# Altium PCB Program_interface_V2.PcbDoc
Units mm, origin at the board's own origin, x right, y up, seen from the top; angles counter-clockwise.
Board outline 50.04 x 50.8 mm, 2 copper layers (Top Layer, Bottom Layer), stack 1.071 mm thick; 11 components, 14 nets, 64 pads, 11 vias.
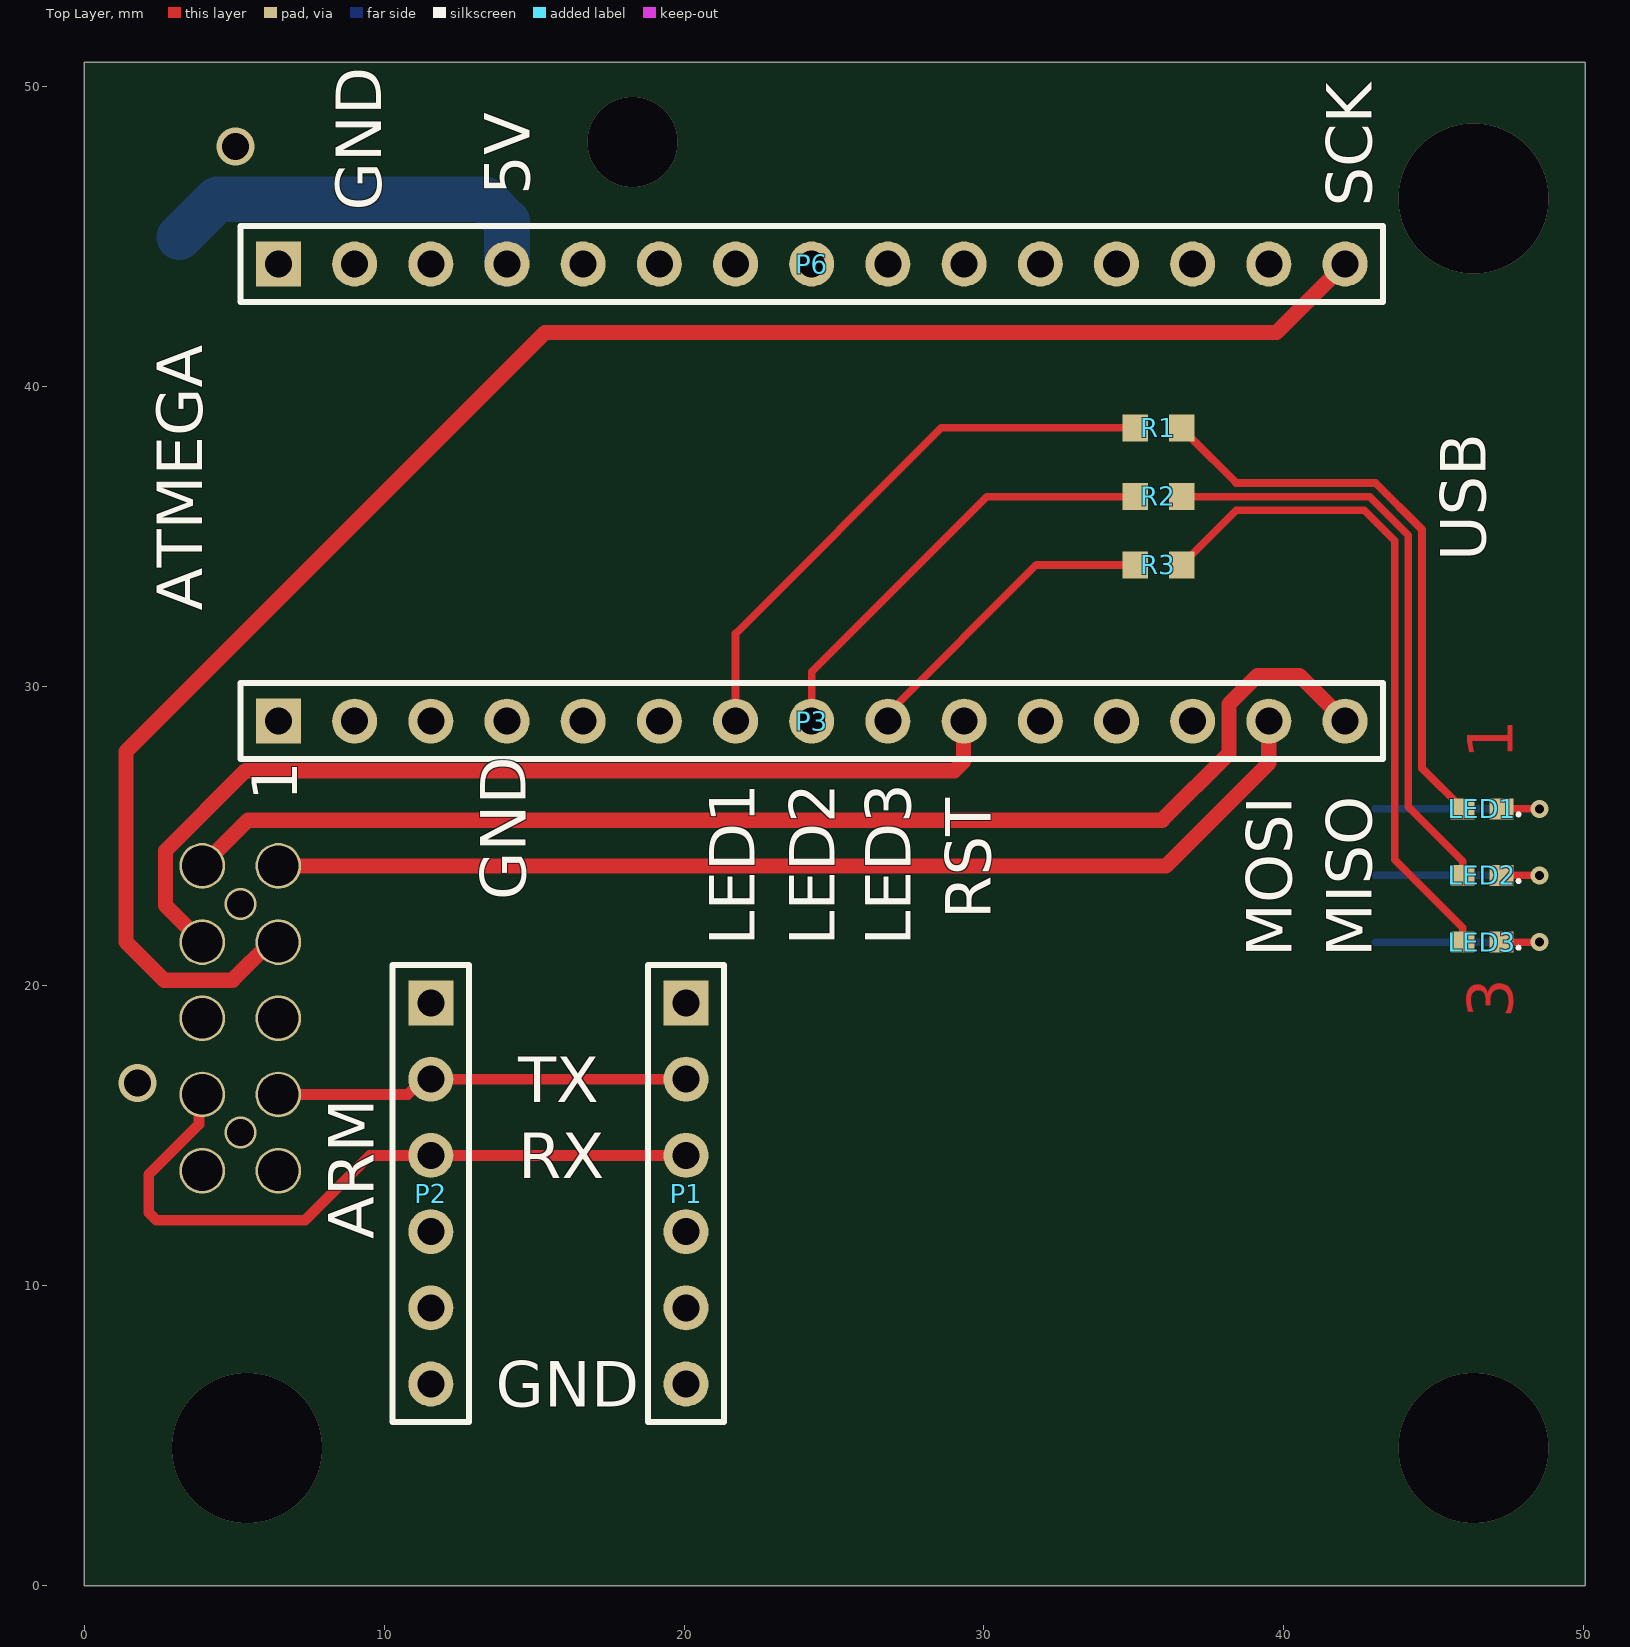
[diagram p0: Top Layer view]
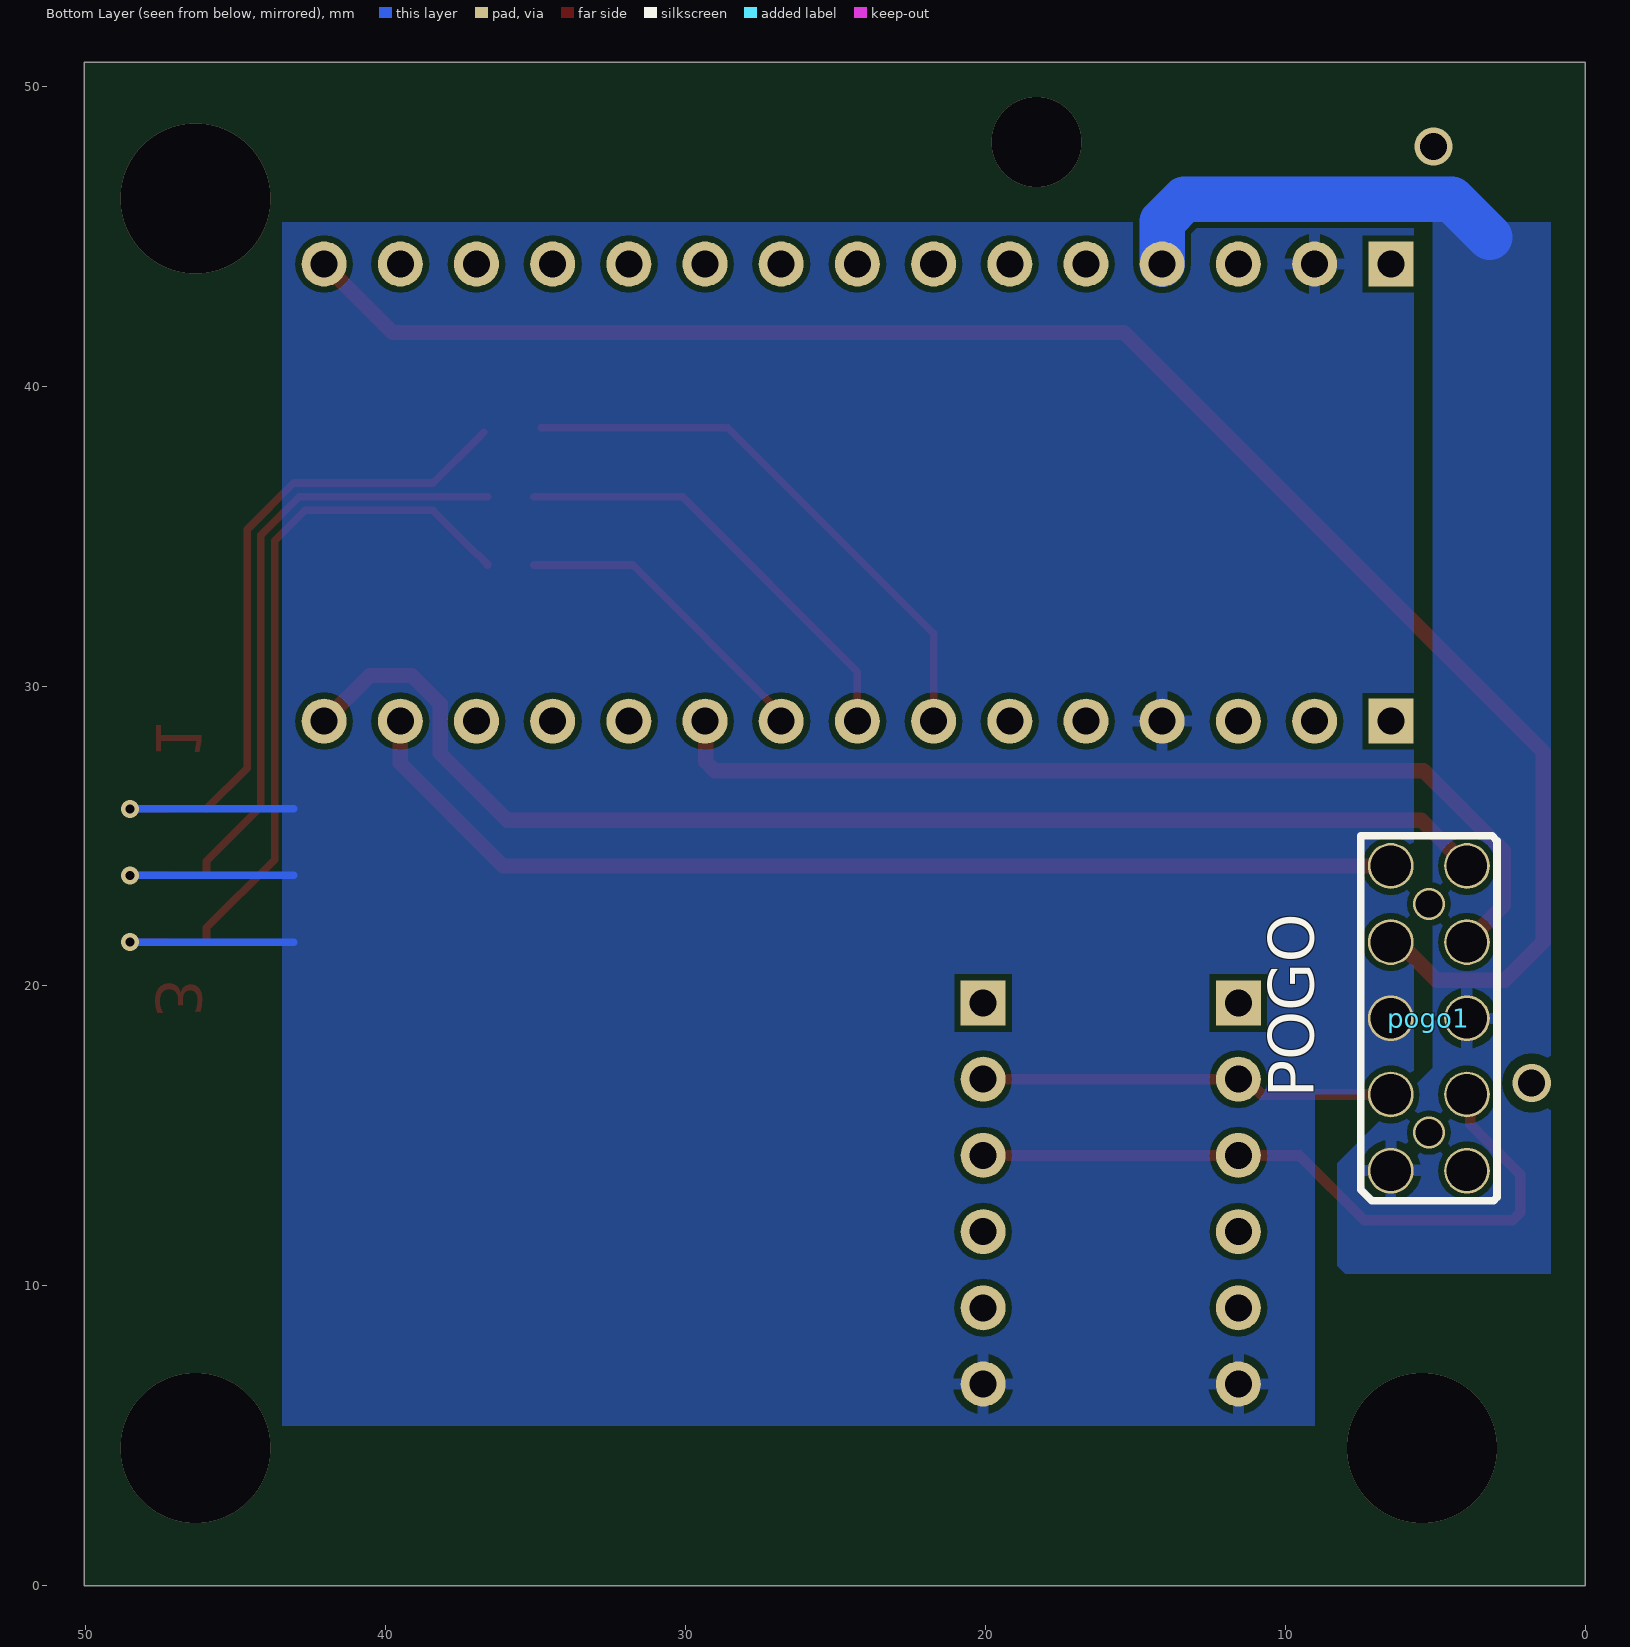
[diagram p1: Bottom Layer view, seen from below]
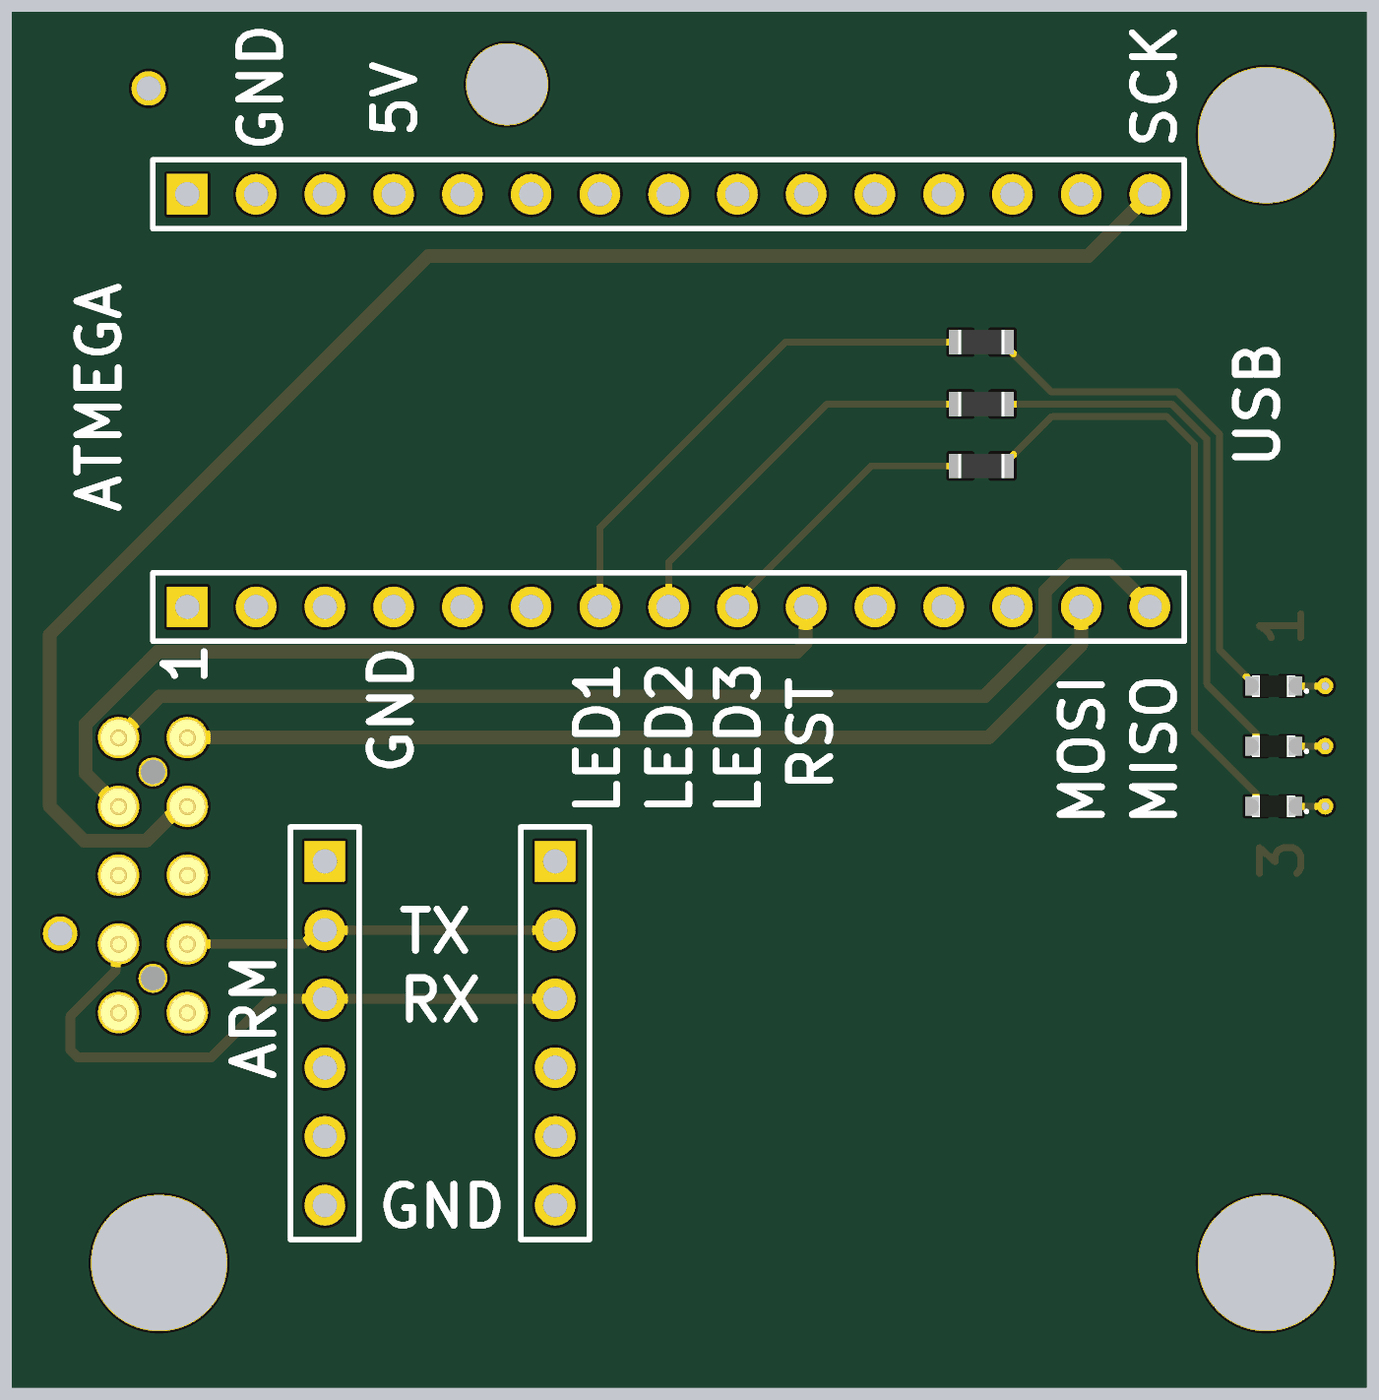
[diagram p2: 3D render of the assembled board from above, using the file's embedded part models]

## Layer stack, top to bottom
Top Solder: solder mask 0.0102, Solder Resist, Dk 3.5
Top Layer: signal copper 0.0356
Dielectric 1: dielectric 1, FR-4, Dk 4.8
Bottom Layer: signal copper 0.0356
Bottom Solder: solder mask 0.0102, Solder Resist, Dk 3.5

## Board outline
0,0 50.038,0 50.038,50.8 0,50.8

## Design rules (kind name [scope] priority, off if disabled: settings)
Clearance [All] p1: gap=0.203 ignorepadtopadclearanceinfootprint=FALSE
PolygonConnect [All] p1: connectstyle=Relief reliefconductorwidth=0.381 reliefentries=4 polygonreliefangle="90 Angle" airgapwidth=0.254
RoomDefinition interface [InComponentClass('interface')] p1 off: confinementstyle=ConfineIn formatcopy=TRUE lockcomponents=FALSE outline 132.842,-43.942 155.575,-43.942 155.575,-24.511 132.842,-24.511
RoutingVias [All] p1: holewidth=0.711 width=1.27 viastyle="Through Hole" minholewidth=0.711 minwidth=1.27 maxholewidth=0.711 maxwidth=1.27
SolderMaskExpansion [All] p1: expansion=0.102 istentingtop=FALSE
Width [All] p1: maxlimit=1.524 minlimit=0.254 preferedwidth=0.508
30 further rules are at their usual default settings.

## Components (designator, comment, footprint, x,y, rotation, side; value= is the part's Value field where it differs from the comment)
LED1 "red" CAC-0P80X160-2N_ver2 46.609,25.908 r180 top
LED2 "red" CAC-0P80X160-2N_ver2 46.609,23.685 r180 top
LED3 "Yellow" CAC-0P80X160-2N_ver2 46.609,21.463 r180 top
P1 "Header 6" HDR1X6 20.066,19.431 r270 top
P2 "Header 6" HDR1X6 11.557,19.431 r270 top
P3 "Header 15" HDR1X15 6.477,28.829 r0 top
P6 "Header 15" HDR1X15 6.477,44.069 r0 top
pogo1 "POGO-connector3x4" POGO_fisico 3.937,24.003 r0 bottom
R1 "0" RESC1608X04N 35.814,38.608 r0 top
R2 "0" RESC1608X04N 35.814,36.322 r0 top
R3 "0" RESC1608X04N 35.814,34.036 r0 top

## Footprints (in the part's own frame and the unit in brackets; to place one, negate y for a bottom-side part, rotate by r counter-clockwise, add the part's x,y. Pads: shape width x height; smd on the part's side, far side on the other; paste and mask are expansions set on the pad)
CAC-0P80X160-2N_ver2 [mm] "Chip Array, Concave, 2-Leads, Pitch 0,00mm,  Body 0,80x1,60mm,  IPC Medium Density"
  rect 0.8x0.7 smd: 1(-0.65,0) 2(0.65,0)
  silkscreen extent -1.26,0.14 -1.16,0.24, body extent -0.85,-0.4 0.85,0.4, height 0.8
HDR1X6 [mm] "Connector; Header; 6 Position"
  rect 1.5x1.5 hole 0.9: 1(0,0)
  round 1.5 hole 0.9: 2(2.54,0) 3(5.08,0) 4(7.62,0) 5(10.16,0) 6(12.7,0)
  silkscreen extent -1.27,-1.27 13.97,1.27
HDR1X15 [mm] "Connector; Header; 15 Position"
  rect 1.5x1.5 hole 0.9: 1(0,0)
  round 1.5 hole 0.9: 2(2.54,0) 3(5.08,0) 4(7.62,0) 5(10.16,0) 6(12.7,0) 7(15.24,0) 8(17.78,0) 9(20.32,0) 10(22.86,0) 11(25.4,0) 12(27.94,0) 13(30.48,0) 14(33.02,0) 15(35.56,0)
  silkscreen extent -1.27,-1.27 36.83,1.27
POGO_fisico [mil] "questo è il pogo fisico. l'altro pogo è l'impronta di questo"
  round 60 hole 53.15: 1(100,400) 2(0,400) 3(0,300) 4(100,300) 5(100,200) 6(0,200) 7(100,100) 8(0,100) 9(100,0) 10(0,0)
  silkscreen extent -39,-39 139,439, body extent -50,-49 150,451, height 332
RESC1608X04N [mm] "Chip Resistor, 0603, 2-Leads, Body 1,60x0,80mm, IPC Medium Density"
  rect 0.85x0.9 smd: 1(-0.775,0) 2(0.775,0)
  body extent -0.85,-0.45 0.85,0.45, height 0.4

## Part data
LED1 LED2: library part HSMS-C190, "AVAGO TECHNOLOGIES - HSMS-C190 - LED, RED, 10MCD, 626NM", Case Code (Imperial)=0603, Case Code (Metric)=1608, Color=Red, Forward Current=20mA, Forward Voltage=2.1V, Lens Color=White, Manufacturer="Broadcom Avago", Max Operating Temperature=85°C, Min Operating Temperature=-40°C, Package Quantity=4000, Power Dissipation=52mW, Reverse Voltage=5V, Supplier Part Number 1=630-HSMS-C190, Case/Package=0603, Category=LEDs, Depth=0.8mm, Dominant Wavelength=626nm, Height=0.8mm, Illumination Color=Red, Lead Free="Lead Free", Length=1.6mm, Lens Style=Diffused,Colorless,Rectangular, Lens Transparency=Diffused, Luminous Intensity=10mcd, Manufacturer Part Number=HSMS-C190, Mount="Surface Mount", Number of Elements=1, Number of LEDs=1, Number of Pins=2, Packaging="Tape and Reel", Power Rating=52mW, Pricing 1="1=0,41000, 10=0,28800, 50=0,28800, 100=0,12800, 1000=0,09400, 10000=0,06400 (USD)", Radiation Hardening=No, REACH SVHC="No SVHC", RoHS=Yes, RoHS Compliant=Yes, Series=-, Stock 1=51818, Supplier 1=Mouser, Test Current=20mA, Viewing Angle=170°, Wavelength=626nm, Width=0.8mm
LED3: library part HSMY-C190, "LED, YELLOW, 8MCD, 586NM; LED Colour:Yellow; Bulb Size:-; Wavelength Typ:586nm; Forward Voltage:2.1V; Forward Current If:20mA; Luminous Intensity:8mcd; LED Mounting:SMD; Lens Shape:Rectangular; Viewing Angle:170 ; Packaging:Cut Tape;;RoHS Compliant: Yes", Case Code (Imperial)=0603, Case Code (Metric)=1608, Forward Current=20mA, Forward Voltage=2.1V, Lens Color=White, Manufacturer="Broadcom Avago", Max Operating Temperature=85°C, Max Power Dissipation=52mW, Min Operating Temperature=-40°C, Package Quantity=1, Reverse Voltage=5V, Supplier Part Number 1=630-HSMY-C190, Case/Package=0603, Category=LEDs, Color=Yellow, ComponentLink1Description=https://datasheet.ciiva.com/34302/1557097-34302483.pdf?src-supplier=Jameco, ComponentLink1URL=https://datasheet.ciiva.com/34302/1557097-34302483.pdf?src-supplier=Jameco, ComponentLink2Description=https://datasheet.ciiva.com/15117/getdatasheetpartid-118294-15117593.pdf?src-supplier=Verical, ComponentLink2URL=https://datasheet.ciiva.com/15117/getdatasheetpartid-118294-15117593.pdf?src-supplier=Verical, ComponentLink3Description=https://datasheet.ciiva.com/11774/0900766b80ad69c9-11774266.pdf?src-supplier=RSComponents, ComponentLink3URL=https://datasheet.ciiva.com/11774/0900766b80ad69c9-11774266.pdf?src-supplier=RSComponents, ComponentLink4Description=https://datasheet.ciiva.com/29280/180660-da-01-en-chip-led-hsmy-c190-gelb-29280613.pdf?src-supplier=Conrad, ComponentLink4URL=https://datasheet.ciiva.com/29280/180660-da-01-en-chip-led-hsmy-c190-gelb-29280613.pdf?src-supplier=Conrad, ComponentLink5Description=https://datasheet.ciiva.com/14172/swseriehsmx-c150toc190-e-14172172.pdf?src-supplier=Distrelec, ComponentLink5URL=https://datasheet.ciiva.com/14172/swseriehsmx-c150toc190-e-14172172.pdf?src-supplier=Distrelec, Contact Plating=Gold, Depth=0.8mm, Dominant Wavelength=586nm, Height=0.8mm, Illumination Color=Yellow, Lead Free="Lead Free", Length=1.6mm, Lens Style=Rectangular,Untinted,Diffused,Colorless, Lens Transparency=Diffused, Luminous Intensity=8mcd, Manufacturer Part Number=HSMY-C190, Mount="Surface Mount", Number of Elements=1, Number of LEDs=1, Number of Pins=2, Number of Terminals/Pins=2, Packaging="Tape and Reel", Power Dissipation=52mW, Power Rating=52mW, Pricing 1="1=0,41000, 10=0,28800, 50=0,28800, 100=0,12800, 1000=0,09400, 10000=0,06400 (USD)", Radiation Hardening=No, REACH SVHC="No SVHC", RoHS=Yes, RoHS Compliant=Yes, Series=-, Shape=Rectangular, Stock 1=44023, Supplier 1=Mouser, Test Current=20mA, Viewing Angle=170°, Wavelength=586nm, Width=0.8mm
P1 P2: "Header, 6-Pin", LatestRevisionDate=17-Jul-2002, LatestRevisionNote="Re-released for DXP Platform.", Publisher="Altium Limited"
P3 P6: "Header, 15-Pin", LatestRevisionDate=17-Jul-2002, LatestRevisionNote="Re-released for DXP Platform.", Publisher="Altium Limited"
pogo1: "pad layout for external pogo connector"
R1 R2 R3: library part RC0603JR-130RL, "YAGEO - RC0603JR-130RL - RES, THICK FILM, 0R, 0.1W, 0603", Case Code (Imperial)=0603, Case Code (Metric)=1608, Manufacturer=Yageo, Max Operating Temperature=155°C, Min Operating Temperature=-55°C, Package Quantity=5000, Power Rating=100mW, Resistance=0mR, Resistor Type="Thick Film", Supplier Part Number 1=603-RC0603JR-130RL, Temperature Coefficient=200ppm/°C, Tolerance=1%, Voltage Rating=50V, Case/Package=0603, Category="Chip SMD Resistors", ComponentLink1Description=https://datasheet.ciiva.com/7983/443971-7983749.pdf?src-supplier=Element14, ComponentLink1URL=https://datasheet.ciiva.com/7983/443971-7983749.pdf?src-supplier=Element14, ComponentLink2Description=https://datasheet.ciiva.com/46395/443971-46395125.pdf?src-supplier=Element14, ComponentLink2URL=https://datasheet.ciiva.com/46395/443971-46395125.pdf?src-supplier=Element14, Construction=Rectangular, Contact Plating=Tin,Matte, Depth=0.8mm, Height=0.45mm, Lead Free="Lead Free", Length=1.6mm, Manufacturer Part Number=RC0603JR-130RL, Military Standard=Not, Number of Pins=2, Packaging="Tape and Reel", Pricing 1="1=0,10000, 10=0,01500, 50=0,01500, 100=0,00500, 1000=0,00500, 10000=0,00500 (USD)", Radiation Hardening=No, REACH SVHC="No SVHC", RoHS=Yes, RoHS Compliant=Yes, Series=RC, Size Code=0603, Stock 1=5989, Supplier 1=Mouser, Termination=SMD/SMT, Voltage Rating (DC)=50V, Width=0.8mm

## Via types
v1: diameter 0.6, hole 0.3, Top Layer to Bottom Layer, 3 vias
v2: diameter 5, hole 5, Top Layer to Bottom Layer, 3 vias
v3: diameter 1.27, hole 0.9, Top Layer to Bottom Layer, 2 vias
v4: diameter 1.067, hole 0.9, Top Layer to Bottom Layer, 2 vias
v5: diameter 3, hole 3, Top Layer to Bottom Layer, 1 vias

## Nets (pads, with @x,y where several pads share a name; then routed paths per layer and width w, separated by ;. In a path a pad name is that pad's centre, name@x,y a point inside that pad or via, vN(x,y) a via of type N, cw(c..) or ccw(c..) an arc to the next point about the centre after c; other vN are vias at no path point)
GND: LED1.1 LED2.1 LED3.1 P1.6 P2.6 P3.4 P6.2 pogo1.5 | length 20.1
  Top Layer w0.254: LED3.1 v1(48.514,21.463) ; LED2.1 v1(48.514,23.685) ; LED1.1 v1(48.514,25.908)
  Bottom Layer w0.254: 43.053,21.463 v1(48.514,21.463) ; 43.053,23.685 v1(48.514,23.685) ; 43.053,25.908 v1(48.514,25.908)
LED1: P3.7 R1.1 | length 18.8
  Top Layer w0.254: P3.7 21.717,31.75 28.575,38.608 R1.1@34.79,38.608
LED2: P3.8 R2.1 | length 14.8
  Top Layer w0.254: P3.8 24.257,30.48 30.089,36.312 R2.1@35.039,36.312
LED3: P3.9 R3.1 | length 10.5
  Top Layer w0.254: P3.9 26.797,29.083 31.75,34.036 R3.1
MISO: P3.15 pogo1.10 | length 42.3
  Top Layer w0.508: pogo1.10 5.461,25.527 35.941,25.527 38.164,27.75 38.164,29.401 39.116,30.353 40.513,30.353 P3.15
MOSI: P3.14 pogo1.9 | length 35.8
  Top Layer w0.508: pogo1.9 36.068,24.003 39.497,27.432 P3.14
NetLED1_2: LED1.2 R1.2 | length 19.1
  Top Layer w0.254: R1.2@36.716,38.456 36.887,38.285 38.403,36.769 43.051,36.769 44.602,35.218 44.602,27.265 LED1.2
NetLED2_2: LED2.2 R2.2 | length 20.2
  Top Layer w0.254: R2.2@36.589,36.312 42.861,36.312 44.145,35.028 44.145,25.976 45.959,24.162 LED2.2
NetLED3_2: LED3.2 R3.2 | length 22.6
  Top Layer w0.254: R3.2 36.589,34.061 36.887,34.359 36.912,34.359 38.408,35.855 42.672,35.855 43.688,34.839 43.688,24.211 45.959,21.94 LED3.2
RST: P3.10 pogo1.8 | length 32.7
  Top Layer w0.508: pogo1.8 2.718,22.682 2.718,24.508 5.388,27.178 29.017,27.178 29.314,27.476 29.314,28.806 P3.10
SCK: P6.15 pogo1.7 | length 59.9
  Top Layer w0.508: pogo1.7 6.223,21.463 4.953,20.193 2.667,20.193 1.397,21.463 1.397,27.813 15.367,41.783 39.751,41.783 P6.15
USART0_RX: P1.3 P2.3 pogo1.3 | length 23.6
  Top Layer w0.356: pogo1.3 3.832,16.278 3.832,15.389 2.159,13.716 2.159,12.446 2.413,12.192 7.366,12.192 9.525,14.351 P2.3 P1.3
USART0_TX: P1.2 P2.2 pogo1.4 | length 13.8
  Top Layer w0.356: pogo1.4 10.785,16.383 11.293,16.891 P2.2 P1.2
V4V: P6.4 pogo1.1 pogo1.6 | length 13.2
  Bottom Layer w1.524: 3.175,44.958 4.445,46.228 13.353,46.228 14.097,45.484 P6.4
pads on no net: P1.1 P1.4 P1.5 P2.1 P2.4 P2.5 P3.1 P3.2 P3.3 P3.5 P3.6 P3.11 P3.12 P3.13 P6.1 P6.3 P6.5 P6.6 P6.7 P6.8 P6.9 P6.10 P6.11 P6.12 P6.13 P6.14 pogo1.2
copper on no net:
  other v2: 5.433,4.597 46.327,4.597 46.327,46.253
  other v3: 1.778,16.764 5.049,47.98
  other v4: 5.207,15.113 5.207,22.733
  other v5: 18.288,48.133

## Polygon pours and split planes (outlines as drawn)
V4V on Bottom Layer "V4V_L02_P001" (solid, pour order 1): 1.143,45.466 5.08,45.466 5.08,17.272 8.255,14.097 8.255,10.668 8.001,10.414 1.143,10.414
GND on Bottom Layer "GND_L02_P000" (solid, remove dead copper, pour order 0): 1.424,45.466 5.715,45.477 5.715,16.383 9.017,16.383 9.017,5.334 43.434,5.334 43.434,45.466

## Other copper
Top Layer:
  text "1" at 47.625,27.559 h1.52 r90
  text "3" at 47.625,18.923 h1.52 r90

## Silkscreen, mask and mechanical layers (free items; w line width, h text height)
Top Overlay:
  text "5V" at 14.859,46.355 h1.52 r90
  text "SCK" at 42.926,45.975 h1.52 r90
  text "GND" at 9.906,45.848 h1.52 r90
  text "USB" at 46.736,34.164 h1.52 r90
  text "ATMEGA" at 3.937,32.513 h1.52 r90
  text "1" at 7.112,26.162 h1.52 r90
  text "GND" at 14.732,22.861 h1.52 r90
  text "RST" at 30.226,22.226 h1.52 r90
  text "LED1" at 22.352,21.337 h1.52 r90
  text "LED2" at 25.019,21.337 h1.52 r90
  text "LED3" at 27.559,21.337 h1.52 r90
  text "MOSI" at 40.259,20.956 h1.52 r90
  text "MISO" at 42.926,20.956 h1.52 r90
  text "TX" at 14.478,16.129 h1.52
  text "RX" at 14.478,13.589 h1.52
  text "ARM" at 9.652,11.558 h1.52 r90
  text "GND" at 13.717,5.969 h1.52
Bottom Overlay:
  text "POGO" at 9.044,16.282 h1.52 r270